# EAGLE board Charger_PCB (EAGLE 7.5.0)
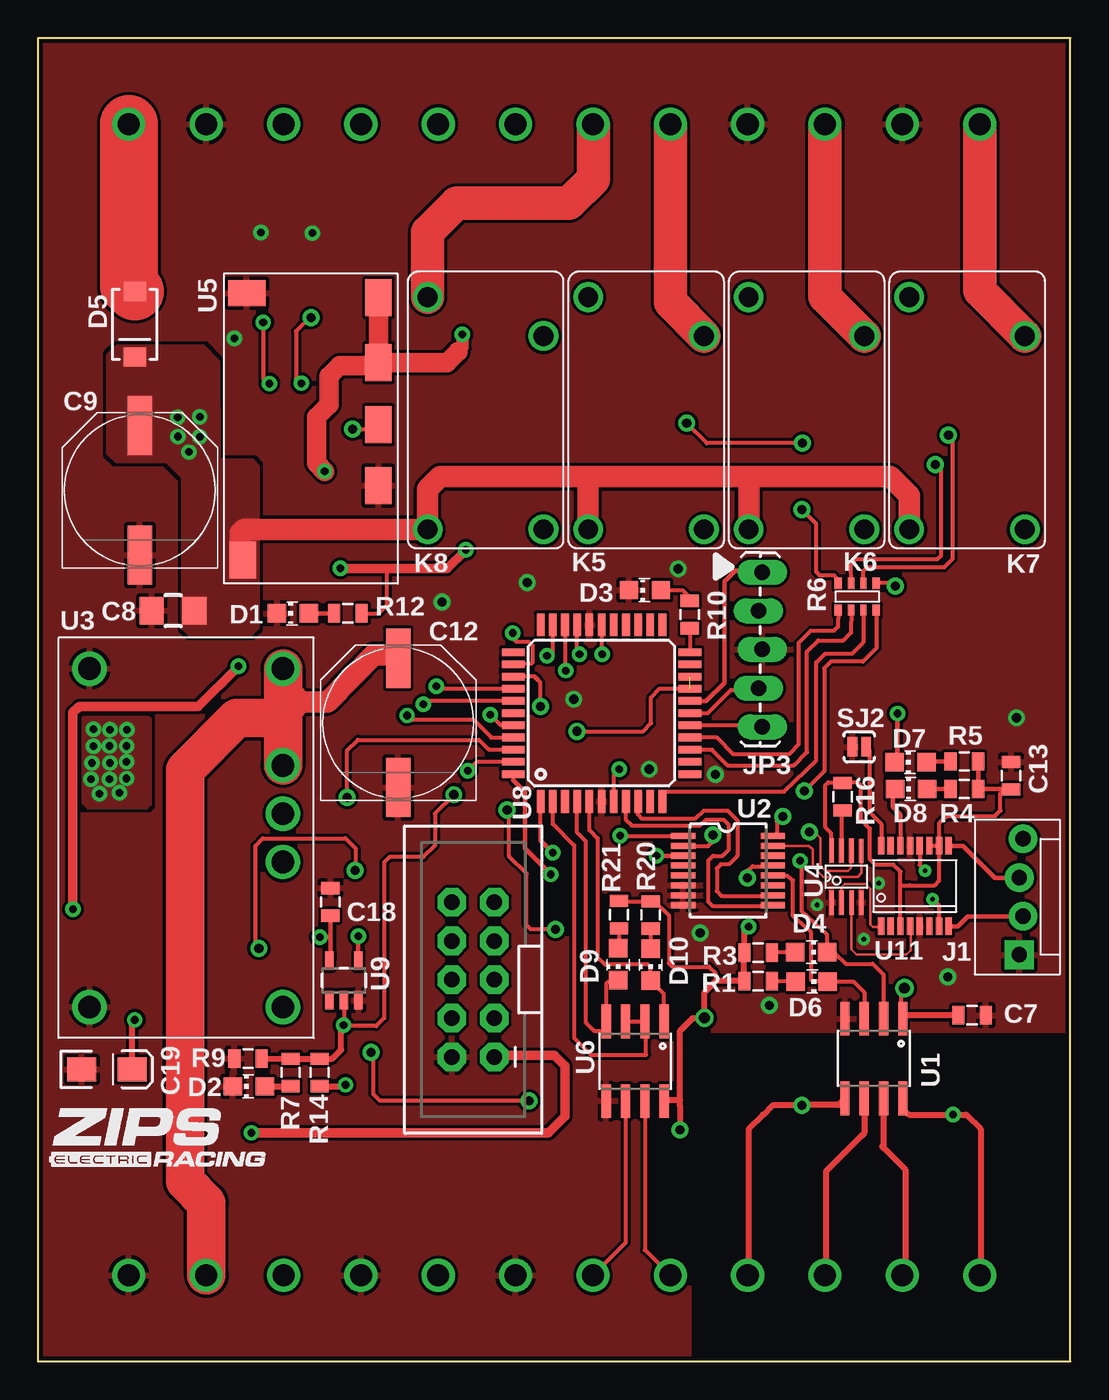
[diagram p0: board, top side]
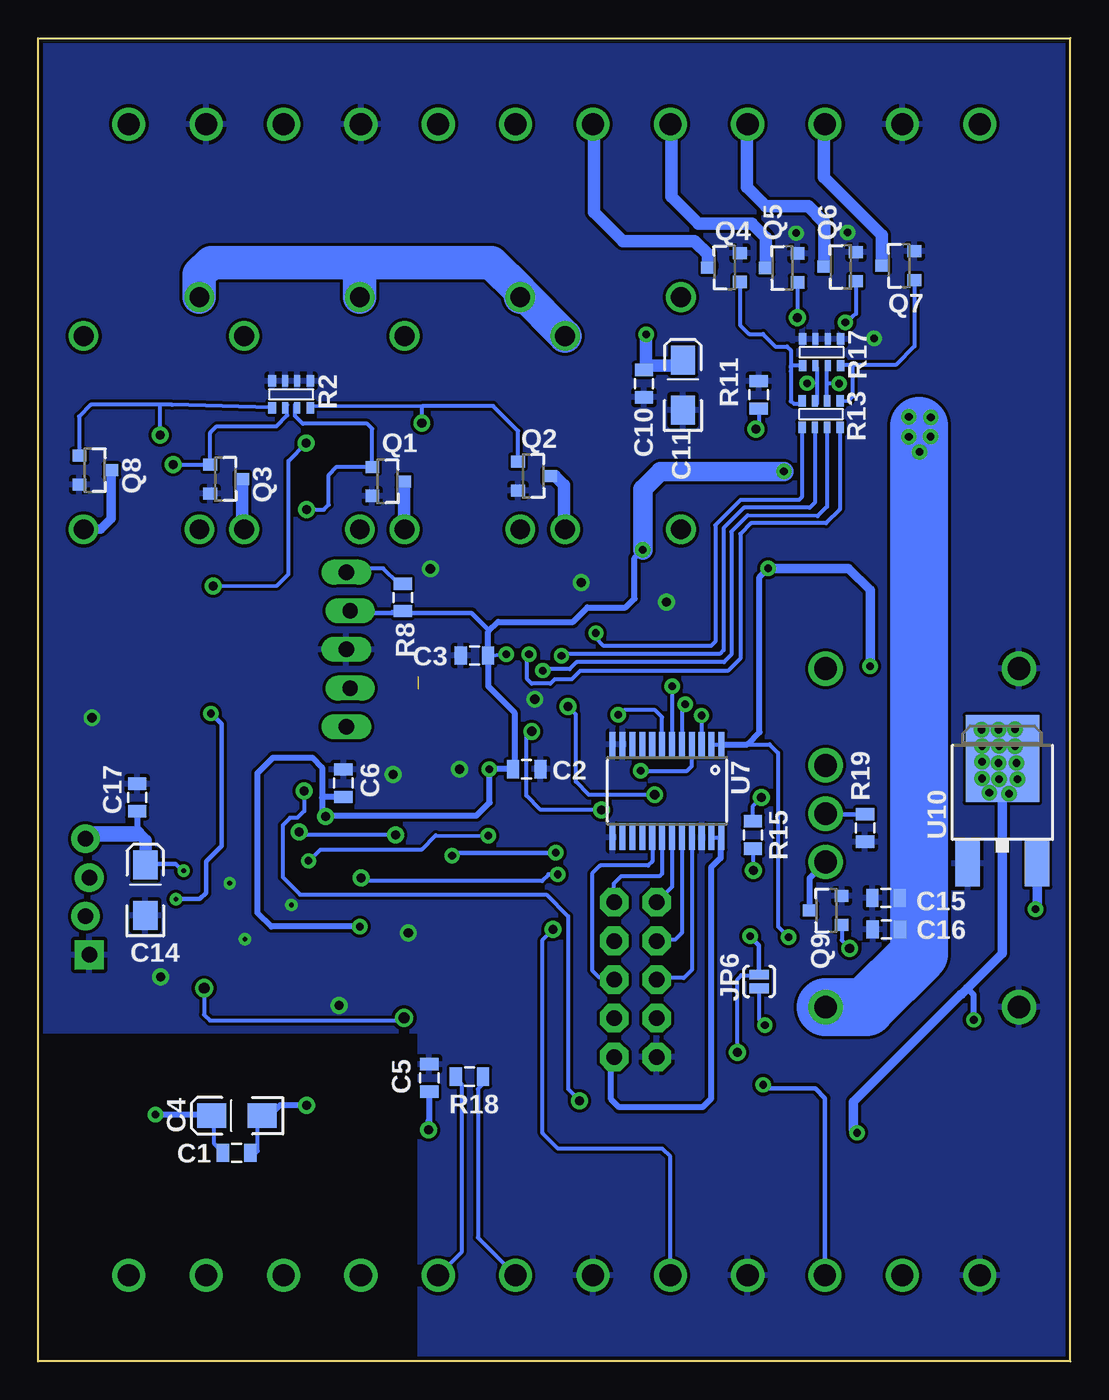
[diagram p1: board, bottom side, seen from below]

Size 67.8 x 86.9 mm. Coordinates in mm from the lower left corner, seen from the top.
Copper layers (1*16): Top 0.035mm / dielectric 1.5mm / Bottom 0.035mm
Design rules "SparkFun *": minimum track width 8mil, minimum drill 18mil, track to track 8mil, track to pad 8mil, pad to pad 8mil, via to via 8mil, smd to smd 8mil, copper to edge 10mil, drill to drill 8mil, minimum pad ring 12mil, minimum via ring 10mil, stop-mask expansion 4mil, vias tented up to drill 25mil, thermal gap 10mil

## Footprints (pad centres in the part's own frame; a part is rotated, then mirrored left to right if it is on the bottom)
0805 = smd 0.8 x 1.2: 1 -0.9,0; 2 0.9,0
EIA3216-16V = smd 1.9 x 1.6: A 1.65,0; C -1.65,0
1206 = smd 1.6 x 1.8: 1 -1.4,0; 2 1.4,0
PANASONIC-G = smd 3.9 x 1.6: + 4.25,0; - -4.25,0
DMB-4772-A = drill 1.45: 1 -27.94,37.8; 2 -22.86,37.8; 3 -17.78,37.8; 4 -12.7,37.8; 5 -7.62,37.8; 6 -2.54,37.8; 7 2.54,37.8; 8 7.62,37.8; 9 12.7,37.8; 10 17.78,37.8; 11 22.86,37.8; 12 27.94,37.8; 13 27.94,-37.8; 14 22.86,-37.8; 15 17.78,-37.8; 16 12.7,-37.8; 17 7.62,-37.8; 18 2.54,-37.8; 19 -2.54,-37.8; 20 -7.62,-37.8; 21 -12.7,-37.8; 22 -17.78,-37.8; 23 -22.86,-37.8; 24 -27.94,-37.8
CHIP_LED0805 = smd 1.2 x 1.2: A 0,-1.05; C 0,1.05
SMA = smd 1.27 x 1.47: A -2.15,0; C 2.15,0
MOLEX_1X4 = drill 1.016 pad 1.88 square: 1 -3.81,0.127 | drill 1.016 pad 1.88: 2 -1.27,-0.127; 3 1.27,0.127; 4 3.81,-0.127
3020-10-0100-00 = drill 1.016 pad 1.88 octagon: 1 -1.397,5.08; 2 1.397,5.08; 3 -1.397,2.54; 4 1.397,2.54; 5 -1.397,0; 6 1.397,0; 7 -1.397,-2.54; 8 1.397,-2.54; 9 -1.397,-5.08; 10 1.397,-5.08
1X05_LOCK_LONGPADS = drill 1.016 long: 1 0,0; 2 2.54,-0.254; 3 5.08,0; 4 7.62,-0.254; 5 10.16,0
SJ_2S-NO = smd 0.635 x 1.27: 1 -0.45,0; 2 0.45,0
OJ-SS-124LMH2 = drill 1.3: 1 -6.35,3.8; 2 -6.35,-3.8; C 6.35,-3.8; NO 8.9,3.8
SOT23 = smd 0.8 x 0.9: 1 -0.95,-1; 2 0.95,-1; 3 0,1.1
MNR14 = smd 0.5 x 0.75: 1 -1.25,-0.9; 4 1.25,-0.9; 5 1.25,0.85; 8 -1.25,0.85 | smd 0.4 x 0.75: 2 -0.4,-0.9; 3 0.4,-0.9; 6 0.4,0.85; 7 -0.4,0.85
PAD-JUMPER-2-NO_YES_SILK = smd 0.635 x 1.27: 1 -0.45,0; 2 0.45,0
SO-8 = smd 0.61 x 2.21: 1 -1.905,-2.616; 2 -0.635,-2.616; 3 0.635,-2.616; 4 1.905,-2.616; 5 1.905,2.616; 6 0.635,2.616; 7 -0.635,2.616; 8 -1.905,2.616
TSSOP-16 = smd 0.4 x 1.6: 1 -2.225,-2.85; 2 -1.575,-2.85; 3 -0.925,-2.85; 4 -0.275,-2.85; 5 0.375,-2.85; 6 1.025,-2.85; 7 1.675,-2.85; 8 2.325,-2.85; 9 2.325,3.05; 10 1.675,3.05; 11 1.025,3.05; 12 0.375,3.05; 13 -0.275,3.05; 14 -0.925,3.05; 15 -1.575,3.05; 16 -2.225,3.05
PTN78060HAH = drill 1.5: 1 2.032,14.732; 2 2.032,2.032; 3 11.557,2.032; 4 14.732,2.032; 5 17.907,2.032; 6 24.257,2.032; 7 24.257,14.732
VFSOP-8 = smd 0.3 x 1.6: 1 -0.98,-1.7; 2 -0.33,-1.7; 3 0.33,-1.7; 4 0.98,-1.7; 5 0.97,1.69; 6 0.325,1.7; 7 -0.33,1.7; 8 -0.98,1.71
APXW003A0X3-SRZ = smd 1.73 x 2.44: 1 -8.88,-3.56 | smd 2.44 x 1.73: 2 8.636,-3.81; 3 3.76,5.08; 4 -0.254,5.08; 5 -4.318,5.08; 6 -8.586,5.08
TSSOP-24 = smd 0.4 x 1.65: 1 -3.575,-3.05; 2 -2.925,-3.05; 3 -2.275,-3.05; 4 -1.625,-3.05; 5 -0.975,-3.05; 6 -0.325,-3.05; 7 0.325,-3.05; 8 0.975,-3.05; 9 1.625,-3.05; 10 2.275,-3.05; 11 2.925,-3.05; 12 3.575,-3.05; 13 3.575,3.05; 14 2.925,3.05; 15 2.275,3.05; 16 1.625,3.05; 17 0.975,3.05; 18 0.325,3.05; 19 -0.325,3.05; 20 -0.975,3.05; 21 -1.625,3.05; 22 -2.275,3.05; 23 -2.925,3.05; 24 -3.575,3.05
TQFP-44 = smd 1.5 x 0.5: 1 -5.8,4; 2 -5.8,3.2; 3 -5.8,2.4; 4 -5.8,1.6; 5 -5.8,0.8; 6 -5.8,0; 7 -5.8,-0.8; 8 -5.8,-1.6; 9 -5.8,-2.4; 10 -5.8,-3.2; 11 -5.8,-4; 23 5.8,-4; 24 5.8,-3.2; 25 5.8,-2.4; 26 5.8,-1.6; 27 5.8,-0.8; 28 5.8,0; 29 5.8,0.8; 30 5.8,1.6; 31 5.8,2.4; 32 5.8,3.2; 33 5.8,4 | smd 0.5 x 1.5: 12 -4,-5.8; 13 -3.2,-5.8; 14 -2.4,-5.8; 15 -1.6,-5.8; 16 -0.8,-5.8; 17 0,-5.8; 18 0.8,-5.8; 19 1.6,-5.8; 20 2.4,-5.8; 21 3.2,-5.8; 22 4,-5.8; 34 4,5.8; 35 3.2,5.8; 36 2.4,5.8; 37 1.6,5.8; 38 0.8,5.8; 39 0,5.8; 40 -0.8,5.8; 41 -1.6,5.8; 42 -2.4,5.8; 43 -3.2,5.8; 44 -4,5.8
SOT23-5 = smd 0.55 x 1.2: 1 -0.95,-1.3; 2 0,-1.3; 3 0.95,-1.3; 4 0.95,1.3; 5 -0.95,1.3
DPAK = smd 1.6 x 3: 1 -2.28,-4.04; 3 2.28,-4.04 | smd 4.826 x 5.715: 2 0,2.858
SSOP-16 = smd 0.419 x 1.143: 1 -2.223,-2.642; 2 -1.587,-2.642; 3 -0.953,-2.642; 4 -0.318,-2.642; 5 0.318,-2.642; 6 0.953,-2.642; 7 1.587,-2.642; 8 2.223,-2.642; 9 2.223,2.642; 10 1.587,2.642; 11 0.953,2.642; 12 0.318,2.642; 13 -0.318,2.642; 14 -0.953,2.642; 15 -1.587,2.642; 16 -2.223,2.642

## Placement (x,y rotation side)
C1  0.1UF  [0805]  54.76,13.69 0 bottom
C2  0.1UF  [0805]  35.71,38.89 0 bottom
C3  0.1UF  [0805]  39.14,46.36 180 bottom
C4  10UF  [EIA3216-16V]  54.74,16.13 180 bottom
C5  0.1UF  [0805]  42.11,18.62 90 bottom
C6  0.1UF  [0805]  47.75,37.97 90 bottom
C7  0.1UF  [0805]  61.34,22.73 0 top
C8  1UF  [1206]  8.86,49.3 180 top
C9  100UF  [PANASONIC-G]  6.68,57.2 90 top
C10  0.1UF  [0805]  28.02,64.21 270 bottom
C11  10UF  [EIA3216-16V]  25.45,64.11 90 bottom
C12  100UF  [PANASONIC-G]  23.65,41.94 90 top
C13  0.1UF  [0805]  63.91,38.46 90 top
C14  10UF  [EIA3216-16V]  60.76,30.94 90 bottom
C15  1UF  [0805]  12.12,30.43 180 bottom
C16  1UF  [0805]  12.09,28.37 180 bottom
C17  0.1UF  [0805]  61.29,37.03 90 bottom
C18  0.1UF  [0805]  19.2,30.18 90 top
C19  10UF  [EIA3216-16V]  4.52,19.18 0 top
CASE1  [DMB-4772-A]  33.9,43.45 0 top
D1  GREEN  [CHIP_LED0805]  16.74,49.13 90 top
D2  GREEN  [CHIP_LED0805]  13.84,18.06 90 top
D3  AMBER  [CHIP_LED0805]  39.85,50.65 90 top
D4  RED  [CHIP_LED0805]  50.77,26.87 270 top
D5  RF201L2STE25  [SMA]  6.35,68.1 270 top
D6  GREEN  [CHIP_LED0805]  50.8,24.94 270 top
D7  GREEN  [CHIP_LED0805]  57.3,39.35 90 top
D8  GREEN  [CHIP_LED0805]  57.33,37.59 90 top
D9  GREEN  [CHIP_LED0805]  38.1,26.09 180 top
D10  RED  [CHIP_LED0805]  40.23,26.06 180 top
J1  M4_1X4_LOCK  [MOLEX_1X4]  64.57,30.51 90 top
J2  M2X5_IDC  [3020-10-0100-00]  28.57,25.07 180 top
JP3  [1X05_LOCK_LONGPADS]  47.56,51.83 270 top
JP6  [SJ_2S-NO]  20.45,24.94 270 bottom
K5  OJ-SS-124LMH2  [OJ-SS-124LMH2]  39.93,60.99 90 top
K6  OJ-SS-124LMH2  [OJ-SS-124LMH2]  50.47,60.99 90 top
K7  OJ-SS-124LMH2  [OJ-SS-124LMH2]  61.01,60.99 90 top
K8  OJ-SS-124LMH2  [OJ-SS-124LMH2]  29.39,60.99 90 top
Q1  NUD3160LT1G  [SOT23]  44.86,57.79 270 bottom
Q2  NUD3160LT1G  [SOT23]  35.28,58.14 270 bottom
Q3  NUD3160LT1G  [SOT23]  55.5,57.94 270 bottom
Q4  BSS123  [SOT23]  22.71,71.83 90 bottom
Q5  BSS123  [SOT23]  18.92,71.81 90 bottom
Q6  BSS123  [SOT23]  15.09,71.88 90 bottom
Q7  BSS123  [SOT23]  11.25,71.96 90 bottom
Q8  NUD3160LT1G  [SOT23]  64.08,58.52 270 bottom
Q9  BSS123  [SOT23]  16.03,29.62 90 bottom
R1  1K  [0805]  47.29,24.97 180 top
R2  10K  [MNR14]  51.18,63.48 180 bottom
R3  1K  [0805]  47.29,26.85 180 top
R4  1K  [0805]  60.83,37.59 0 top
R5  1K  [0805]  60.83,39.4 0 top
R6  1K  [MNR14]  53.8,50.24 0 top
R7  1K  [0805]  16.59,18.98 90 top
R8  10K  [0805]  43.84,50.17 270 bottom
R9  10K  [0805]  13.79,19.89 0 top
R10  1K  [0805]  42.8,49.05 270 top
R11  16.2K  [0805]  20.47,63.48 270 bottom
R12  1K  [0805]  20.34,49.13 0 top
R13  1K  [MNR14]  16.38,62.18 180 bottom
R14  10K  [0805]  18.49,18.98 270 top
R15  1k  [0805]  20.85,34.57 270 bottom
R16  1K  [0805]  52.83,37.09 90 top
R17  10K  [MNR14]  16.34,66.24 180 bottom
R18  120  [0805]  39.47,18.7 180 bottom
R19  383K  [0805]  13.49,35.03 90 bottom
R20  1K  [0805]  40.23,29.31 90 top
R21  1K  [0805]  38.15,29.34 90 top
SJ2  [PAD-JUMPER-2-NO_YES_SILK]  53.92,40.36 0 top
U1  ISO7221  [SO-8]  54.89,19.89 180 top
U2  CD74HC4052PWR  [TSSOP-16]  45.21,32.29 270 top
U3  PTN78060HAH  [PTN78060HAH]  18.11,21.24 90 top
U4  SN74LVC2G241  [VFSOP-8]  53.09,31.83 0 top
U5  APXW003A0X3-SRZ  [APXW003A0X3-SRZ]  17.27,61.27 270 top
U6  SN75HVD08DRSOIC  [SO-8]  39.22,19.71 180 top
U7  74LVC8T245  [TSSOP-24]  26.49,37.47 180 bottom
U8  PIC18F45K22  [TQFP-44]  37.01,42.57 90 top
U9  NC7S14M5X  [SOT23-5]  20.09,25.02 0 top
U10  NCP1117DT_3.3  [DPAK]  4.47,36.73 0 bottom
U11  FT230X  [SSOP-16]  57.58,31.22 0 top
U$1  LOGO16-2-L  [2016-2-LOGO-L]  0.69,12.68 0 top

## Library data of the parts
C1-C3 C5-C7 C10 C13 C17 C18 = FSAE Electric; PARTNO: CC0805ZRY5V9BB104
C4 C11 C14 C19 = FSAE Electric; PARTNO: T491A106M016AT
C8 = FSAE Electric; PARTNO: CC1206ZRY5V9BB105
C9 C12 = FSAE Electric; PARTNO: EEE-1HA101P
C15 C16 = FSAE Electric; PARTNO: UMK212F105ZG-T
CASE1 = FSAE Electric; PARTNO: DMB-4772
D1 D2 D6-D9 = FSAE Electric; PARTNO: LTST-S220GKT
D3 = FSAE Electric; PARTNO: HSMA-C170
D4 D10 = FSAE Electric; PARTNO: LH R974-LP-1
D5 = FSAE Electric; PARTNO: RF201L2STE25
J1 = FSAE Electric; PARTNO: 0022232041
J2 = FSAE Electric; PARTNO: 3020-10-0100-00
JP3 = SparkFun-Connectors
JP6 SJ2 = SparkFun-Passives
K5-K8 = FSAE Electric; PARTNO: OJ-SS-124LMH2
Q1-Q3 Q8 = FSAE Electric; PARTNO: NUD3160LT1G
Q4-Q7 Q9 = FSAE Electric; PARTNO: BSS123,215
R1 R3-R5 R7 R10 R12 R15 R16 R20 R21 = FSAE Electric; PARTNO: RC0805FR-071KL
R2 R17 = FSAE Electric; PARTNO: MNR14ERAPJ103
R6 R13 = FSAE Electric; PARTNO: MNR14ERAPJ102
R8 R9 R14 = FSAE Electric; PARTNO: RC0805FR-0710KL
R11 = FSAE Electric; PARTNO: RC0805FR-0716K2L
R18 = FSAE Electric; PARTNO: RC0805FR-07120RL
R19 = FSAE Electric; PARTNO: RC0805FR-07383KL
U1 = FSAE Electric; PARTNO: ISO7221ADR
U2 = FSAE Electric; PARTNO: CD74HC4052PWR
U3 = FSAE Electric; PARTNO: PTN78060HAH
U4 = FSAE Electric; PARTNO: SN74LVC2G241DCUR
U5 = FSAE Electric; PARTNO: APXW003A0X3-SRZ
U6 = FSAE Electric; PARTNO: SN75176BDR
U7 = FSAE Electric; PARTNO: 74LVC8T245PW,118
U8 = FSAE Electric; PARTNO: PIC18F45K22T-I/PT
U9 = FSAE Electric; PARTNO: NC7S14M5X
U10 = FSAE Electric; PARTNO: NCP1117DT33RKG
U11 = FSAE Electric; PARTNO: FT230XS-R
U$1 = Pic

## Nets
3V: C13.1 R4.2 R5.2 R16.2 U4.8 U11.3 U11.10 U11.11
!INH: R15.1 U8.42
+3V3: C19.A J2.1 U7.23 U7.24 U10.2
+5V: C2.1 C3.1 C5.1 C6.1 C7.1 C10.1 C11.A C18.1 JP3.2 R1.2 R3.2 R8.2 R12.2 R20.2 R21.2 U1.1 U2.16 U5.5 U5.6 U6.8 U7.1 U7.2 U8.7 U8.28 U9.5 U10.3
+12V: C12.+ CASE1.23 U3.5 U3.6
+24V: C8.1 C9.+ C15.1 C16.1 D5.C K5.1 K6.1 K7.1 K8.1 U3.2 U5.2
AIR-TOP: R6.2 U8.14
BLUE: R13.6 U8.32
BLUE-HC: CASE1.5 Q5.3
BOTTOM: CASE1.12 K7.C
CS_3V3: J2.10 U7.19
CS_5V: U7.5 U8.38
GND: C2.2 C3.2 C5.2 C6.2 C7.2 C8.2 C9.- C10.2 C11.C C12.- C13.2 C14.C C15.2 C16.2 C17.2 C18.2 C19.C CASE1.2 CASE1.9 CASE1.11 CASE1.19 CASE1.21 CASE1.24 D1.C D2.C D3.C J1.1 J2.2 JP3.3 Q1.2 Q2.2 Q3.2 Q4.2 Q5.2 Q6.2 Q7.2 Q8.2 Q9.2 R2.1 R2.2 R2.3 R2.4 R9.1 R11.1 R17.1 R17.2 R17.3 R17.4 R19.1 SJ2.1 U1.4 U2.6 U2.7 U2.8 U3.1 U3.7 U4.1 U4.4 U5.1 U5.3 U6.5 U7.11 U7.12 U7.13 U7.22 U8.6 U8.29 U9.3 U10.1 U11.5 U11.13
GPIO: CASE1.20 U8.19 U8.20
GREEN: R13.7 U8.31
GREEN-HC: CASE1.4 Q6.3
HORN: R13.8 U8.30
HORN-HC: CASE1.3 Q7.3
IMD-R-SET: K8.2 Q2.3
IMD-R-SET1: K6.2 Q3.3
IMD-R-SET2: K5.2 Q1.3
IMD-R-SET3: K7.2 Q8.3
IMD_IN: CASE1.22 R14.2
IMD_STAT: JP6.2 R7.2 R9.2 R14.1 U8.36 U9.2
INPUT: CASE1.7 K8.NO
LCD_DC_3V3: J2.6 U7.21
LCD_DC_5V: U7.3 U8.41
LCD_RES_3V3: J2.5 U7.17
LCD_RES_5V: U7.7 U8.40
MAIN: CASE1.10 K6.C
MOSI_3V3: J2.8 U7.20
MOSI_5V: U7.4 U8.43
N$1: D3.A R10.1
N$2: R10.2 U8.22
N$3: C1.1 C4.A CASE1.13 U1.8
N$4: CASE1.14 U1.7
N$5: CASE1.15 U1.6
N$6: C1.2 C4.C CASE1.16 U1.5
N$7: D6.A R1.1
N$8: D4.A R3.1
N$9: D7.A R5.1
N$10: D8.A R4.1
N$11: D2.A R7.1
N$12: Q9.3 U3.3
N$13: K5.NO K6.NO K7.NO K8.C
N$14: Q2.1 R2.8 R6.5
N$15: Q8.1 R2.5 R6.6
N$16: R11.2 U5.4
N$17: D1.A R12.1
N$18: R19.2 U3.4
N$19: Q9.1 R15.2
N$20: D9.A R21.1
N$21: Q4.1 R13.4 R17.5
N$22: D10.A R20.1
N$23: Q3.1 R2.6 R6.7
N$24: Q1.1 R2.7 R6.8
N$25: Q5.1 R13.3 R17.6
N$26: Q6.1 R13.2 R17.7
N$27: Q7.1 R13.1 R17.8
N$28: SJ2.2 U11.16
N$29: CASE1.1 D5.A
N$30: U4.2 U11.1
N$31: JP6.1 R6.4 U9.4
N$36: D7.C U11.7
N$38: D8.C U11.14
N$39: U4.3 U11.4
N$40: JP3.4 U8.17
N$42: J1.3 U11.9
N$43: JP3.5 U8.16
N$46: JP3.1 R8.1 U8.18
N$54: J1.2 U11.8
N$69: R16.1 U4.7
N$85: C14.A C17.1 J1.4 U11.12
POWER: R6.1 U8.15
PRE&HV-: R6.3 U8.11
PRE-CHARGE: CASE1.8 K5.C
RS-A: CASE1.18 R18.1 U6.6
RS-B: CASE1.17 R18.2 U6.7
RX1: U2.3 U8.1
RX2: D10.C U6.1 U8.5
RX_POWER: D4.C U1.2 U2.1
S0: U2.10 U8.9
S1: U2.9 U8.8
SCK_3V3: J2.9 U7.18
SCK_5V: U7.6 U8.37
TX1: U2.13 U8.44
TX2: D9.C U6.4 U8.4
TX_POWER: D6.C U1.3 U2.12
U6-RE/DE: U6.2 U6.3 U8.2
USBRX: U2.2 U4.6
USBTX: U2.15 U4.5
YELLOW: R13.5 U8.35
YELLOW-HC: CASE1.6 Q4.3

## Tracks (layer width: path | path; a pad name or v marks a point on that pad's centre or on a via)
3V
  Top 0.254: 63.19,37.27 63.19,36.17 62.84,35.82 59.66,35.82 59.17,35.32 U11.10 | C13.1 63.79,37.56 63.7,37.64 | U11.10 U11.11 | U11.3 56.63,31.26 | 56.63,31.26 57.25,31.27 58.88,31.27 59.18,31.57 59.18,33.85 U11.10 | 56.63,31.26 56.63,32.17 56.18,32.62 54.99,32.62 54.64,32.97 54.64,34.98 54.03,35.59 54.03,37.82 53.82,38.03 52.87,38.03 R16.2 52.79,38.03 51.89,38.03 51.71,37.85 51.71,35.05 52.08,34.69 52.08,33.56 U4.8
  Top 0.305: R5.2 61.73,37.78 61.62,37.67 61.66,37.67 R4.2 63.65,37.59 63.7,37.64 63.57,37.64 63.19,37.27
!INH  (via drill 0.6)
  Top 0.254: v20.29,37.04 20.29,40.11 21.01,40.82 28.96,40.82 29.59,40.18 31.2,40.18 U8.42
  Bottom 0.254: R15.1 20.85,36.48 v20.29,37.04
+3V3  (via drill 0.5)
  Top 0.254: J2.1 30.02,19.99 30.02,19.94
  Top 0.406: C19.A 6.17,22.25 v6.35,22.43
  Top 0.61: v14.02,15.01 33.53,15.01 34.59,16.08 34.59,19.41 33.91,20.09 30.17,20.09 30.02,19.94
  Bottom 0.254: U7.24 U7.23 23.06,34.42 22.99,34.5 | U10.2 4.47,39.55 v4.72,39.3
  Bottom 0.406: 22.99,34.5 22.99,33.05 23.6,32.44 23.6,17.25 24.16,16.69 29.64,16.69 30.17,17.22 30.17,19.79 29.97,19.79 J2.1 | v6.35,22.43 6.35,24.08 6.77,24.5
  Bottom 0.61: U10.2 4.47,26.8 6.77,24.5 7.16,24.11 7.19,24.11 14.25,17.05 14.25,15.24 v14.02,15.01
  other vias: 3.63,41.51 4.72,41.48 5.84,41.48 3.63,40.39 4.7,40.41 5.82,40.41 3.53,39.3 5.82,39.37 3.48,38.23 4.7,38.23 5.82,38.28 4.04,37.29 5.33,37.34
  pour Top: 3.05,42.29 7.21,42.29 7.34,42.17 7.34,36.6 7.11,36.37 3.3,36.37 3,36.68 3,42.24
+5V  (via drill 0.5, 0.5 pad 0.41, 0.6, 0.7 pad 0.41)
  Top 0.254: 37,46.49 v37.06,46.43 37.01,46.48 U8.28 | 37.8,38.52 37.81,38.52 | R12.2 22.38,49.12 22.91,49.66 22.91,51.92 22.76,52.07 | v18.52,27.87 19.15,27.87 19.2,27.82 | 56.69,22.53 56.95,22.79 | 56.69,22.53 56.69,22.71 56.69,24.31 v56.89,24.51 | R1.2 46.39,24.48 46,25 | v48.92,35.79 48.84,35.79 48.51,35.46 48.51,34.49 U2.16 | 38.37,30.16 38.3,30.41 38.19,30.41 R21.2 38.2,30.19 40.33,30.19 | 44.51,24.98 44.48,25.02 44.48,25.5 44.07,25.91 41.66,25.91 41.43,26.14 41.43,29.29 40.53,30.19 40.33,30.19 | R20.2 40.31,30.21 40.33,30.19 | U8.7 37.81,38.52 | 37.81,38.52 v38.17,38.89 | 41.22,17.17 41.17,17.22 41.17,17.15 U6.8 | 56.69,22.53 56.79,22.53 U1.1
  Top 0.305: C18.1 19.2,27.82 19.2,26.46
  Top 0.406: 27.99,53.19 v28.09,53.29 | 46.34,25.02 44.55,25.02 44.51,24.98 43.76,24.23 v43.76,22.56 43,22.56 42.16,21.72 42.16,17.17 | 46.34,25.02 R1.2 | 46.34,25.02 46.34,26.74 46.56,26.95 46.5,26.95 R3.2 46.39,28.29 v46.66,28.55 | C7.1 56.72,22.74 56.69,22.71 | 19.2,26.46 19.14,26.46 U9.5 | 41.22,17.17 42.16,17.17 | v42.16,15.22 42.16,16.77 42.16,17.17
  Top 0.61: v2.29,29.69 2.29,42.6 2.69,43 10.52,43 v13.16,45.65 | v19.86,52.07 22.76,52.07 26.87,52.07 v28.09,53.29
  Top 0.813: 26.65,65.38 27.57,66.31 27.86,66.6 v27.86,67.44
  Top 1.27: v18.82,58.45 18.29,58.98 18.29,62 19.1,62.82 19.1,64.7 19.79,65.38 22.15,65.38 U5.5 | U5.6 U5.5 | U5.5 26.85,65.58 27.57,66.31
  Bottom 0.178: 43.94,22.38 43.89,22.38 43.69,22.58
  Bottom 0.254: v37.06,46.43 38.06,46.33 C3.1 | 36.52,38.98 C2.1 | U7.2 U7.1 | 21.23,40.52 19.76,40.52 19.2,39.96 19.2,28.55 v18.52,27.87 | 44.54,49.24 44.45,49.15 | v56.89,24.51 56.89,22.76 56.51,22.38 43.94,22.38 v43.76,22.56 43.74,22.61 43.71,22.58 | R8.2 43.84,49.25 43.94,49.15 | 48.67,35.54 v48.92,35.79
  Bottom 0.305: 38.24,47.92 38.24,48.07 39.32,49.15 43.94,49.15 44.45,49.15 47.17,49.15 JP3.2 | 48.89,35.82 v48.92,35.79
  Bottom 0.406: v28.09,53.29 28.62,52.76 28.62,50.09 29.21,49.51 31.72,49.51 32.66,48.57 37.59,48.57 38.24,47.92 C3.1 38.24,44.34 36.52,42.62 36.52,38.98 | U7.1 21.23,40.52 20.42,41.33 20.42,51.51 v19.86,52.07 | v46.66,28.55 52.48,28.55 53.39,29.47 53.39,38.64 52.37,39.65 49.78,39.65 49.15,39.02 49.15,37.01 | 49.15,37.01 49.15,36.02 v48.92,35.79 | 49.15,37.01 49.08,37.08 C6.1 | 48.67,35.54 48.67,35.66 48.84,35.84 39.01,35.84 38.15,36.71 38.15,38.64 38.04,38.75 v38.17,38.89 | C2.1 v38.17,38.89 | v38.17,38.89 38.25,38.81 | C5.1 42.11,14.96 42.16,15.78 v42.16,15.22
  Bottom 0.61: U10.3 2.19,29.79 v2.29,29.69 | v13.16,45.65 13.16,50.65 14.58,52.07 v19.86,52.07
  Bottom 0.813: v27.86,67.44 27.86,65.27 C10.1 27.74,65.38 25.91,65.38 25.53,65.76 C11.A
  Bottom 1.27: v18.82,58.45 26.92,58.45 28.09,57.28 v28.09,53.29
+12V
  Top 1.422: 16.51,43.31 19,43.31 20.62,44.93 20.62,44.96 22.05,46.38 23.45,46.38 C12.+
  Top 2.54: 16.08,42.27 16.05,42.24 13.05,42.24 9.65,38.84 9.65,11.81 11.04,10.42 CASE1.23 | 16.08,42.27 U3.5 | U3.6 16.08,42.88 | 16.08,42.27 16.08,42.88 | 16.08,42.88 16.51,43.31
+24V  (via drill 0.5 pad 0.41)
  Top 1.422: 36.3,58.09 26.39,58.09 25.59,57.29 K8.1 13.51,54.64 13.28,54.41 13.28,52.46 | 36.3,58.09 46.48,58.09 | 46.48,58.09 55.98,58.09 57.23,56.85 57.23,54.65 K7.1 | K6.1 46.67,57.9 46.48,58.09 | K5.1 36.13,57.92 36.3,58.09
  Bottom 0.305: 9.93,61.44 10.03,61.44 v10.62,62.03 | C15.1 10.85,30.43 9.93,29.52 | C16.1 9.98,28.37 9.93,28.42
  Bottom 3.81: U3.2 13.44,23.27 9.93,26.77 9.93,28.42 9.93,29.52 9.93,61.44
  other vias: 9.17,62 9.19,60.73 10.62,60.71 9.91,59.72
  pour Top (no thermals): 4.62,59.64 4.62,66.04 5.21,66.63 10.82,66.68 11.84,65.64 11.86,59.77 11.86,59.13 5.18,59.08
  pour Top (no thermals): 8.43,59.16 14.05,59.16 14.43,58.78 14.43,48.24 13.89,47.7 10.01,47.7 9.52,48.19 9.52,58.07
AIR-TOP
  Top 0.254: R6.2 53.39,47.86 52.88,47.35 51.23,47.35 50.49,46.61 50.49,40.01 49.63,39.14 45.29,39.14 44.27,40.16 42.81,40.16 U8.14
BLUE  (via drill 0.5 pad 0.41)
  Top 0.254: v33.43,46.33 33.63,46.33 33.81,46.51 33.81,48.36
  Top 0.406: 33.81,48.36 33.81,48.49 | 33.81,48.49 | 33.81,48.49 U8.32
  Bottom 0.254: R13.6 16.79,56.39 17.12,56.06 21.44,56.06 22.78,54.71 22.78,46.71 23.04,46.46 33.3,46.46 v33.43,46.33
BLUE-HC
  Bottom 0.813: CASE1.5 26.21,81.18 26.21,76.48 24.43,74.7 20.93,74.7 20.01,73.79 20.01,71.81 Q5.3
BOTTOM
  Top 2.184: CASE1.12 61.84,70.31 K7.C
CS_3V3
  Bottom 0.254: U7.19 26.17,31.16 J2.10
CS_5V  (via drill 0.5 pad 0.41)
  Top 0.254: 25.58,43.36 25.48,43.29 | 25.48,43.29 v25.3,43.16 | U8.38 25.56,43.37 25.48,43.29
  Bottom 0.254: v25.3,43.16 25.53,43.11 25.53,40.53 U7.5
GND  (via drill 0.3, 0.5 pad 0.41, 0.6)
  other vias: 12.9,67.18 14.63,74.14 18.01,74.09 59.74,25.25 55.22,31.4 51.15,29.97 48.03,23.37 43.48,28.14 40.13,38.89 35.18,43.49 64.26,42.27 32.13,51.16 26.54,49.86 42.04,52.05 44.47,38.53 54.23,27.74
  pour Top (rank 6): -1.73,89.05 69.39,89.05 69.39,21.74 42.72,21.74 42.72,-2.39 -1.73,-2.39
  pour Bottom: -4.27,91.59 71.78,91.8 71.93,21.74 42.72,21.74 42.72,-4.93 -4.27,-4.93
GPIO  (via drill 0.6)  (1 unrouted)
  Top 0.254: v33.98,28.37 32.36,28.37 32.08,28.65 32.08,32.03 30.94,33.17 30.94,36.1 v30.81,36.22 | v35.38,41.38 39.73,41.38 40.26,41.91 40.26,43.61 40.82,44.17 U8.19 | 43.03,44.17 U8.19 | U8.19
  Bottom 0.254: CASE1.20 26.28,13.46 26.8,13.97 33.65,13.97 34.67,14.99 34.67,27.69 v33.98,28.37 | v30.81,36.22 34.8,36.22 35.74,37.16 35.74,41.02 v35.38,41.38
GREEN  (via drill 0.5 pad 0.41)
  Top 0.254: v34.65,45.37 34.65,48.32
  Top 0.406: U8.31 34.65,48.37 34.65,48.32
  Bottom 0.254: R13.7 15.98,56.13 16.61,55.5 21.21,55.55 22.27,54.48 22.27,46.41 22.76,45.93 32.44,45.93 32.89,45.47 34.54,45.47 v34.65,45.37
GREEN-HC
  Bottom 0.813: CASE1.4 21.26,81.19 21.26,77.12 19.99,75.85 17.22,75.85 16.15,74.78 16.15,71.92 Q6.3
HORN  (via drill 0.5 pad 0.41)
  Top 0.254: v35.56,46.43 35.56,46.46 35.41,46.61 35.41,48.36
  Top 0.406: U8.30 | U8.30 35.41,48.36
  Bottom 0.254: R13.8 15.15,55.95 16.05,55.04 20.98,55.04 21.69,54.33 21.69,46.15 22.5,45.34 32.21,45.34 32.77,44.78 33.88,44.78 34.16,44.5 35.38,44.5 35.69,44.81 35.69,46.31 v35.56,46.43
HORN-HC
  Bottom 0.813: CASE1.3 16.18,81.19 16.18,77.75 12.39,73.97 12.39,72 Q7.3
IMD-R-SET
  Bottom 0.813: Q2.3 33.86,58.14 33.25,57.53 33.25,54.7 K8.2
IMD-R-SET1
  Bottom 0.813: Q3.3 54.4,54.77 K6.2
IMD-R-SET2
  Bottom 0.813: Q1.3 43.76,54.67 K5.2
IMD-R-SET3
  Bottom 0.61: Q8.3 62.98,55.36 63.68,54.66 64.78,54.66 K7.2
IMD_IN  (via drill 0.5 pad 0.41)
  Top 0.406: R14.2 20.11,18.08 v20.19,18.16
  Bottom 0.305: CASE1.22 16.12,17.29 16.76,17.93 19.96,17.93 v20.19,18.16
IMD_STAT  (via drill 0.5 pad 0.41, 0.6)
  Top 0.254: v27.3,37.21 26.06,35.97 26.06,33.89 25.3,33.12 23.09,33.12 22.73,32.77 22.73,22.56 22.2,22.02 20.12,22.02 v20.07,22.07 | v32.99,43 32.99,44.58 32.82,44.76 | 32.61,44.96 U8.36 | U9.2 20.09,22.33 19.79,22.02 19.94,22.02 19.98,21.99
  Top 0.305: 32.61,44.96 32.82,44.76 | 19.91,21.11 19.91,21.92 | 19.98,21.99 v20.07,22.07
  Top 0.406: R9.2 R7.2 R14.1 19.31,19.88 19.91,20.47 19.91,21.92 19.98,21.99
  Bottom 0.254: JP6.2 20.45,22.46 v20.07,22.07 | v27.3,37.21 31.62,37.21 32.49,38.08 32.49,42.5 v32.99,43
INPUT
  Top 2.184: K8.NO 25.59,74.15 27.48,76.05 34.87,76.05 36.47,77.65 36.47,81.22 CASE1.7
LCD_DC_3V3
  Bottom 0.254: U7.21 24.87,25.71 25.4,25.17 27.15,25.17 | 27.15,25.17 27.33,25.17 | J2.6 27.18,25.15 27.15,25.17
LCD_DC_5V  (via drill 0.5 pad 0.41)
  Top 0.254: v24.23,42.42 24.54,42.12 28.62,42.12 29.77,40.96 31.2,40.96 U8.41
  Bottom 0.254: v24.23,42.42 24.23,40.53 U7.3
LCD_RES_3V3
  Bottom 0.254: U7.17 27.47,32.83 27.74,32.56 30.89,32.56 31.42,32.03 31.42,25.68 30.96,25.22 29.97,25.22 J2.5 29.97,25.05
LCD_RES_5V  (via drill 0.5)
  Top 0.254: v29.69,42.47 30.38,41.79 31.5,41.79 31.52,41.76 31.22,41.76 U8.40
  Bottom 0.254: U7.7 26.82,42.31 27.28,42.78 29.34,42.78 v29.69,42.47
MAIN
  Top 2.184: CASE1.10 51.68,69.93 K6.C
MOSI_3V3
  Bottom 0.254: U7.20 25.52,28.16 25.98,27.69 27.1,27.69 J2.8
MOSI_5V  (via drill 0.5 pad 0.41)
  Top 0.254: v28.22,38.79 28.8,39.37 U8.43
  Bottom 0.254: v28.22,38.79 25.17,38.79 24.87,39.09 U7.4
N$1
  Top 0.254: D3.A 42.32,50.65 42.8,50.17 R10.1
N$2
  Top 0.254: R10.2 U8.22
N$3  (via drill 0.5 pad 0.41)
  Top 0.406: CASE1.13 61.9,5.71 61.9,15.27 60.96,16.21 60.22,16.21 v60.1,16.21 57.2,16.21 56.79,16.61 U1.8
  Bottom 0.254: C1.1 55.66,13.73 56.23,14.3 56.23,15.78 56.39,15.93 C4.A
  Bottom 0.406: 56.23,16.67 56.65,16.25 | 56.65,16.25 56.69,16.21 v60.1,16.21 | C4.A 56.54,16.13 56.65,16.25
N$4
  Top 0.406: 55.42,14.12 55.52,14.02 | CASE1.14 56.95,5.84 56.95,12.6 55.56,13.98 55.52,14.02 | U1.7 55.52,14.02
N$5
  Top 0.406: CASE1.15 51.74,5.71 51.74,12.47 54.04,14.77 54.15,14.89 54.25,14.99 U1.6
N$6  (via drill 0.6)
  Top 0.406: CASE1.16 46.66,5.71 46.66,15.27 47.6,16.21 47.62,16.21 48.26,16.84 50.19,16.84 | U1.5 52.55,16.84 50.19,16.84 | 50.19,16.84 v50.16,16.82
  Bottom 0.254: C1.2 53.49,13.69 53.37,13.82 53.37,15.93 | 53.37,15.93 53.37,15.95 | 53.37,15.95 53.24,16.08 53.24,16.05 53.37,15.93 | 53.37,15.95 53.37,16.13 C4.C
  Bottom 0.406: v50.16,16.82 51.89,16.82 52.73,15.98 52.93,15.98 C4.C
N$7
  Top 0.254: D6.A 48.22,24.94 R1.1
N$8
  Top 0.254: D4.A 48.17,26.88 | 47.98,26.88 48.17,26.88 | 48.17,26.88 R3.1
N$9
  Top 0.305: R5.1 58.4,39.4 D7.A
N$10
  Top 0.305: R4.1 58.6,37.59 58.52,37.52 58.45,37.52 D8.A
N$11
  Top 0.406: D2.A 16.57,18.06 R7.1
N$12
  Bottom 0.406: Q9.3 17.13,31.74 U3.3
N$13
  Bottom 2.184: K7.NO 57.21,71.39 56.44,72.16 47.17,72.16 | 47.17,72.16 38.01,72.16 36.13,70.28 | 36.13,70.28 K8.C | K5.NO 36.13,70.28 | K6.NO 46.67,71.67 47.17,72.16
N$14  (via drill 0.6)
  Top 0.254: R6.5 55.08,51.05 55.14,51.16 56.06,51.16 v56.31,50.93 | v50.19,60.3 43.92,60.3 v42.59,61.62
  Bottom 0.254: Q2.1 36.28,61.1 37.92,62.74 42.54,62.74 | 42.54,62.74 49.91,62.71 R2.8 | v56.31,50.93 52.09,50.95 51.36,51.69 51.36,59.13 v50.19,60.3 | v42.59,61.62 42.59,62.69 42.54,62.74
N$15  (via drill 0.6)
  Top 0.254: R6.6 54.2,51.89 54.46,52.15 59.51,52.15 60.07,52.71 60.07,60.56 v59.79,60.84
  Bottom 0.254: R2.5 58.99,62.83 59,62.82 59.84,62.82 | 59.84,62.82 64.34,62.82 65.1,62.05 65.1,59.49 Q8.1 | v59.79,60.84 59.79,62.77 59.84,62.82
N$16  (via drill 0.6)
  Top 0.254: v20.65,61.22 22.05,61.22 U5.4
  Bottom 0.254: R11.2 20.47,61.39 v20.65,61.22
N$17
  Top 0.305: D1.A R12.1
N$18
  Bottom 0.305: R19.2 16.04,35.93 U3.4
N$19  (via drill 0.6)
  Top 0.254: v14.5,27.13 14.5,27.23 14.27,27.46 14.27,33.86 14.76,34.34 20.18,34.34 R15.2 20.85,32.51 v20.83,32.23
  Bottom 0.254: Q9.1 15.03,27.65 v14.5,27.13 | v20.83,32.23 20.83,33.63 20.95,33.76 20.94,33.76 R15.2
N$20
  Top 0.254: R21.1 38.15,27.26 D9.A
N$21
  Bottom 0.254: R17.5 18.36,65.39 | 18.36,65.39 18.36,65.03 18.36,63.04 18.16,62.89 17.73,62.89 R13.4 | 18.36,65.39 18.36,65.29 18.36,66.4 18.62,66.65 19.38,66.65 20.19,67.46 21.11,67.46 21.71,68.06 Q4.1
N$22
  Top 0.254: R20.1 D10.A | D10.A 40.23,26.93 40.26,26.9 40.26,27.09 D10.A
N$23  (via drill 0.6)
  Top 0.254: R6.7 53.39,52.36 53.72,52.68 59.05,52.68 59.31,52.94 59.31,58.52 v58.93,58.9
  Bottom 0.254: R2.6 51.43,62.82 51.43,62.13 52.14,61.42 56.06,61.42 56.5,60.98 Q3.1 56.51,58.9 v58.93,58.9
N$24  (via drill 0.6)
  Top 0.254: R6.8 52.54,51.35 52.27,51.61 51.33,51.61 51.1,51.84 51.1,54.99 v50.16,55.93
  Bottom 0.254: R2.7 50.93,62.82 50.93,62.08 50.42,61.57 46.18,61.57 45.86,61.25 Q1.1 45.87,58.75 48.18,58.75 48.72,58.22 48.72,56.26 49.05,55.93 v50.16,55.93
N$25  (via drill 0.5 pad 0.41, 0.6)
  Top 0.254: v17.3,64.24 16.94,64.49 16.94,67.64 17.22,67.92 17.78,68.43 v17.93,68.53
  Bottom 0.254: R17.6 16.66,65.27 16.66,64.19 | 16.66,64.19 16.66,62.86 R13.3 | 16.66,64.19 16.71,64.24 v17.3,64.24 | Q5.1 17.92,68.61 | 17.92,68.61 v17.92,68.54 | v17.93,68.53 17.91,68.59 17.92,68.61
N$26  (via drill 0.5)
  Top 0.254: v14.78,68.23 14.78,64.52 v15.19,64.21
  Bottom 0.254: v15.19,64.21 16,64.21 | 16,64.21 16,65.25 R17.7 | R13.2 16.01,64.14 16,64.21 | Q6.1 14.09,68.79 v14.78,68.23
N$27
  Bottom 0.254: 14.27,65.43 11.48,65.43 10.25,66.66 Q7.1 | 14.27,65.43 15.01,65.43 R17.8 | R13.1 14.59,63.06 14.27,63.38 14.27,65.43
N$28
  Top 0.254: SJ2.2 54.61,40.13 54.61,36.07 55.37,35.31 U11.16
N$29
  Top 3.81: CASE1.1 5.96,70.64 D5.A
N$30
  Top 0.178: U4.2 52.75,31.12 52.98,31.35 54.36,31.35 54.66,31.04 54.66,28.7 54.84,28.53 55.31,28.53 U11.1
N$31  (via drill 0.5 pad 0.41, 0.6)
  Top 0.254: R6.4 55.05,46.85 54.15,45.95 52.07,45.95 51.64,45.52 51.64,38.79 v50.32,37.47 | v32.23,17.12 22.45,17.12 22.02,17.55 22.02,20.14 v21.87,20.3
  Top 0.305: v21.03,27.92 21.03,26.39
  Top 0.406: 21.03,26.39 21.04,26.39 U9.4
  Bottom 0.254: v32.23,17.12 32.99,17.88 32.99,29.24 34.42,30.66 50.6,30.66 51.74,31.8 51.74,35.21 51.26,35.69 50.77,35.69 50.32,36.15 v50.32,37.47 | v21.87,20.3 21.87,25.1 21.62,25.35 20.49,25.35 JP6.1
  Bottom 0.305: JP6.1 20.45,27.33 v21.03,27.92
N$36  (via drill 0.3, 0.5)
  Top 0.254: 59.17,29.94 U11.7
  Top 0.305: 59.17,29.94 v58.75,30.36 | v56.44,42.55 56.44,39.65 56.39,39.6 56.39,39.47 56.36,39.45 56.35,39.45 D7.C
  Bottom 0.305: v58.75,30.36 57.17,30.36 56.77,30.76 56.77,32.82 55.75,33.83 55.75,41.86 v56.44,42.55
N$38
  Top 0.254: 56.63,35.91 U11.14
  Top 0.305: 56.63,35.91 56.13,36.4 56.13,37.45 D8.C
N$39
  Top 0.178: U4.3 53.41,27.05 53.75,26.72 57.02,26.72 57.3,27 57.3,28.54 U11.4
N$40
  Top 0.254: JP3.4 47.19,44.1 45.52,44.1 43.98,42.56 43.98,42.57 U8.17
N$42
  Top 0.305: U11.9 60.73,33.86 62.84,31.75 64.41,31.75 J1.3
N$43
  Top 0.254: 47.47,41.76 42.81,41.76 U8.16
  Top 0.406: 47.47,41.76 JP3.5
N$46
  Top 0.254: U8.18 43.86,43.37 43.87,43.36
  Top 0.305: 43.87,43.36 45.06,44.55 45.06,51.21 45.8,51.95 47.45,51.95 JP3.1
  Bottom 0.254: JP3.1 47.32,52.07 45.14,52.07 44.13,51.07 R8.1
N$54
  Top 0.305: U11.8 60.4,28.58 61.06,29.24 J1.2
N$69
  Top 0.254: R16.1 52.83,36.17 52.75,36.1 52.75,33.35 52.73,33.33 52.73,33.5 U4.7
N$85  (via drill 0.3)
  Top 0.254: U11.12 57.9,32.58 v58.24,32.23
  Bottom 0.254: 61.29,34.77 61.19,34.67 | v58.24,32.23 58.34,32.23 58.78,32.67
  Bottom 0.305: 58.78,32.67 60.68,32.67 C14.A | 61.49,34.7 61.52,34.67
  Bottom 0.406: C17.1 61.29,34.77
  Bottom 0.813: 61.52,34.67 61.31,34.67 61.19,34.67 60.73,34.22 60.73,32.84 60.63,32.74 60.63,32.72 C14.A
  Bottom 1.016: J1.4 64.39,34.32 64.08,34.62 61.37,34.62 61.31,34.67
POWER
  Top 0.254: R6.1 52.54,48.26 52.27,47.98 50.75,47.98 49.96,47.2 49.96,40.54 49.33,39.91 45.64,39.91 44.58,40.96 42.81,40.96 U8.15
PRE&HV-
  Top 0.254: R6.3 54.2,47.22 53.47,46.48 51.69,46.48 51.1,45.9 51.1,39.47 49,37.42 41.1,37.42 41,37.32 U8.11
PRE-CHARGE
  Top 2.184: CASE1.8 41.52,69.55 K5.C
RS-A
  Top 0.254: CASE1.18 38.4,7.61 38.58,7.79 U6.6
  Bottom 0.254: CASE1.18 38.91,8.12 38.91,17.88 38.4,18.4 38.57,18.58 R18.1
RS-B
  Top 0.254: CASE1.17 39.85,7.32 U6.7
  Bottom 0.254: 40.4,18.6 40.37,18.58 | 40.37,18.58 40,18.21 40,7.17 CASE1.17 | R18.2 40.37,18.58
RX1  (via drill 0.5 pad 0.41)
  Top 0.254: 33,34.21 U8.1
  Top 0.305: 33,34.21 v33.81,33.4 | v40.61,33.2 42.6,33.2 U2.3
  Bottom 0.305: v33.81,33.4 40.41,33.4 v40.61,33.2
RX2
  Top 0.254: 41.1,22.13 41.1,21.9 | U6.1 41.12,22.15 41.1,22.13 | U8.5 36.14,36.71 36.14,36.65 36.2,36.6 36.2,34.89 36.75,34.34 36.75,26.55 37.24,26.06 40.08,26.06 40.23,25.91 D10.C 41.1,24.15 41.1,22.13
RX_POWER  (via drill 0.5 pad 0.41)
  Top 0.254: v38.23,34.52 42.58,34.52 U2.1 | v50.04,32.87 50.14,32.64 50.14,29.57 51.79,28.04 51.79,26.91 D4.C 52.27,26.88 53.03,26.11 54.81,26.11 55.52,25.4 U1.2
  Bottom 0.254: v50.04,32.87 49.25,33.61 42.59,33.63 41.68,34.55 v38.23,34.52
S0
  Top 0.254: U2.10 48.51,30.58 44.88,30.58 44.58,30.89 44.58,32.39 44.83,32.64 45.36,32.64 45.92,33.2 45.92,35.54 45.29,36.17 43.71,36.17 43.18,35.66 39.62,35.66 39.4,35.91 39.4,36.81 | 39.4,36.81 39.5,36.91 | U8.9 39.41,36.81 39.4,36.81
S1
  Top 0.254: U2.9 48.5,29.92 44.27,29.92 44.02,30.18 44.02,32.9 44.32,33.2 44.96,33.2 45.36,33.61 45.36,35.23 45.03,35.56 43.87,35.56 43.46,35.18 38.99,35.18 38.6,35.57 U8.8
SCK_3V3
  Bottom 0.254: U7.18 26.82,32.04 27,31.85 29.51,31.85 30,31.37 30,30.18 J2.9
SCK_5V  (via drill 0.5 pad 0.41)
  Top 0.254: 26.32,44.16 26.31,44.17 | U8.37 26.31,44.17 | 26.31,44.17 v26.16,44.33
  Bottom 0.254: v26.16,44.33 U7.6
TX1  (via drill 0.5 pad 0.41, 0.6)
  Top 0.254: v46.58,31.75 46.58,32.21 46.91,32.51 48.49,32.51 U2.13 | U8.44 31.21,38.17 31.2,38.17
  Top 0.305: 31.2,38.17 31.98,37.39 31.98,33.68 v33.68,31.98
  Bottom 0.254: 34.29,31.98 34.29,31.96 34.7,31.55 46.38,31.55 v46.58,31.75
  Bottom 0.305: v33.68,31.98 34.29,31.98
TX2
  Top 0.254: U8.4 35.4,34.73 35.97,34.17 35.97,22.28 36.52,21.72 37.16,21.72 37.16,22.18 U6.4 37.31,24.82 37.63,25.04 D9.C
TX_POWER
  Top 0.254: U2.12 49.19,31.91 49.58,31.6 49.58,29.26 50.77,28.17 50.77,25.05 50.9,24.94 D6.C 53.54,24.94 54.25,24.23 U1.3
U6-RE/DE
  Top 0.254: U6.3 39.73,22.33 39.79,22.27 | 39.79,22.27 39.85,22.2 39.88,22.2 39.93,22.15 39.93,20.14 39.9,20.12 36.32,20.12 35.2,21.24 35.2,33.89 33.8,35.29 U8.2 | U6.2 39.79,22.27
USBRX  (via drill 0.6)
  Top 0.178: 50.72,34.77 50.98,34.77 51.38,34.37 51.38,32.54 51.71,32.21 53.19,32.21 53.39,32.41 53.39,33.51 U4.6
  Top 0.254: U2.2 43.99,33.84 44.25,34.09 44.25,34.5 v44.32,34.57 | v50.65,34.77 50.72,34.77 | U4.6 53.39,33.53 53.39,33.62
  Bottom 0.254: v44.32,34.57 50.44,34.57 v50.65,34.77
USBTX
  Top 0.178: U4.5 54.08,33.5 54.08,32.08 53.82,31.83 51.56,31.83 50.88,32.51 50.88,33.61 50.62,33.86 U2.15
  Top 0.254: 54.05,33.6 U4.5
YELLOW  (via drill 0.5 pad 0.41)
  Top 0.254: v31.16,47.83 31.16,47.5 31.39,47.27 32.21,47.27 32.49,46.99 32.49,45.9 32.38,45.8 31.23,45.8 31.23,45.77 U8.35
  Bottom 0.254: R13.5 17.64,56.76 17.83,56.57 21.66,56.57 23.32,54.92 23.32,47.27 23.6,46.99 30.66,46.99 31.16,47.5 v31.16,47.83
YELLOW-HC
  Bottom 0.813: CASE1.6 31.29,81.18 31.29,75.47 29.39,73.56 24.69,73.56 23.82,72.7 23.82,72.06 23.72,71.96 23.72,71.92 Q4.3